# EAGLE board Test101 (EAGLE 9.7.0)

Size 59.62 x 39.1 mm. Coordinates in mm from the lower left corner, seen from the top.
Outline: 0,0 59.62,0 59.62,39.1 0,39.1 0,0
Copper layers (1*16): Top 0.035mm / dielectric 1.5mm / Bottom 0.035mm
Design rules "default": minimum track width 6mil, minimum drill 0.35mm, track to track 6mil, track to pad 6mil, pad to pad 6mil, via to via 6mil, smd to smd 6mil, copper to edge 40mil, drill to drill 6mil, minimum pad ring 10mil, minimum via ring 8mil, stop-mask expansion 4mil, vias tented up to drill 0mil, thermal gap 10mil

## Footprints (pad centres in the part's own frame; a part is rotated, then mirrored left to right if it is on the bottom)
BATTERY-GENERIC = drill 1.118 pad 3.15 octagon: + 2.54,0; - -2.54,0
1X02 = drill 1.016 long: 1 -1.27,0; 2 1.27,0

## Placement (x,y rotation side)
BAT1  6V  [BATTERY-GENERIC]  8.26,8.26 0 top
L1  LIGHTBULB  [1X02]  53.9,32.83 0 top

## Library data of the parts
BAT1 L1 = Tinkercad

## Nets
BAT1+: BAT1.+ L1.1
BAT1-: BAT1.- L1.2

## Tracks (layer width: path | path; a pad name or v marks a point on that pad's centre or on a via)
BAT1+  (1 unrouted)
BAT1-  (1 unrouted)